# Altium PCB phone.PcbDoc
Units mm, origin at the board's own origin, x right, y up, seen from the top; angles counter-clockwise.
Board outline 35 x 16 mm, 2 copper layers (Top Layer, Bottom Layer); 17 components, 12 nets, 37 pads, 3 vias.
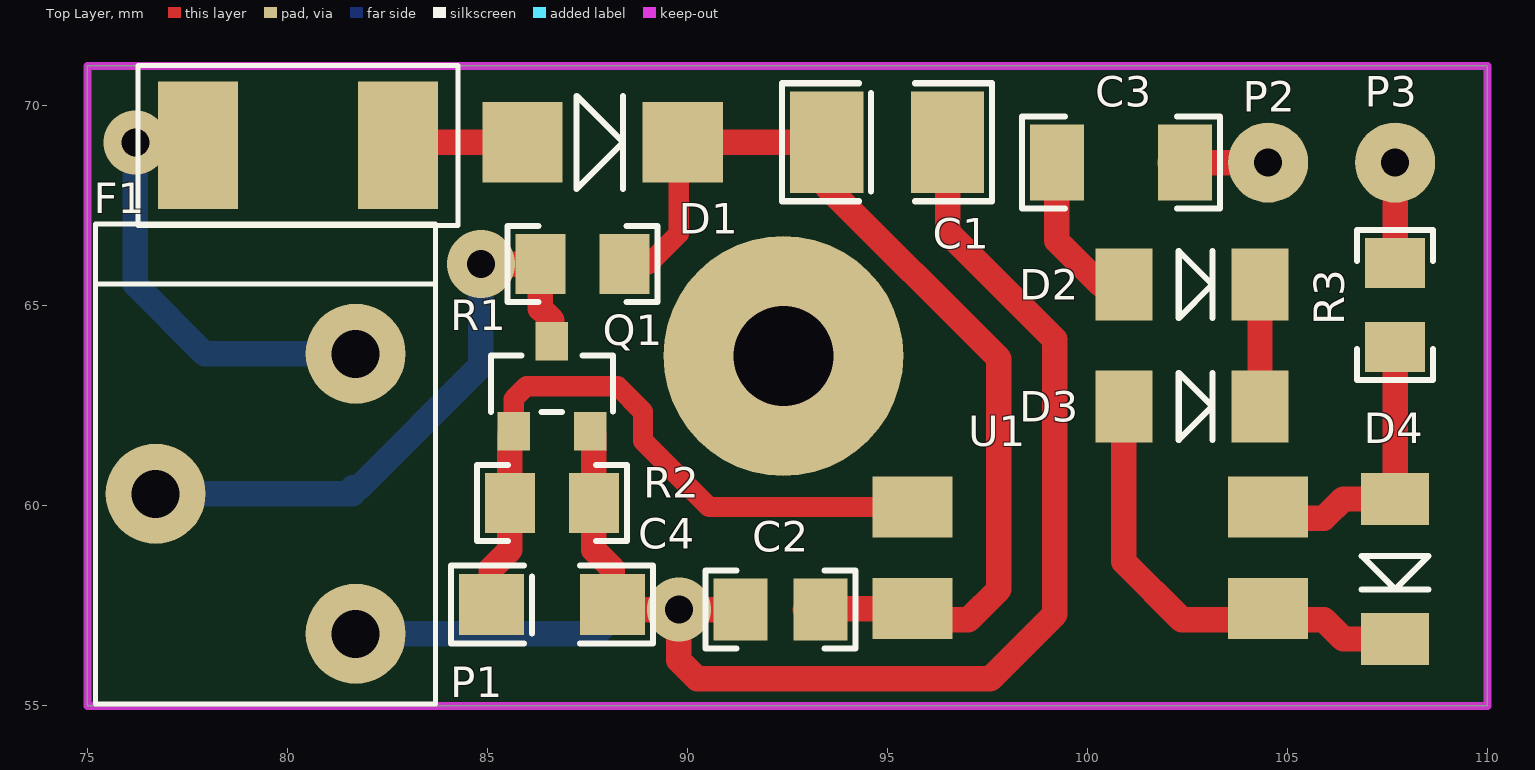
[diagram p0: Top Layer view]
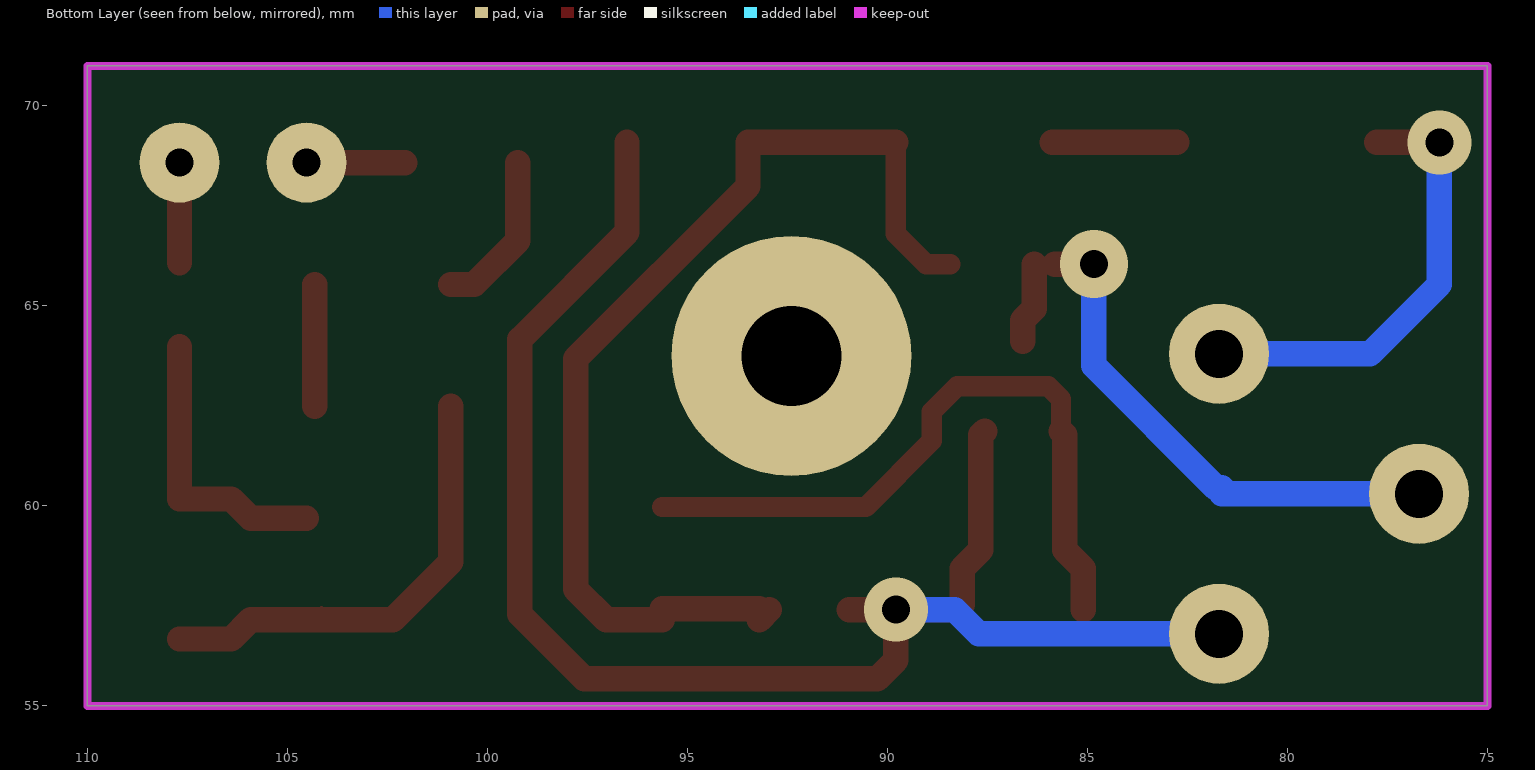
[diagram p1: Bottom Layer view, seen from below]

## Layer stack, top to bottom
Top Layer: signal copper 0.0356
Dielectric: dielectric 0.32, FR-4, Dk 4.8
Bottom Layer: signal copper 0.0356

## Board outline
75,55 110,55 110,71 75,71

## Design rules (kind name [scope] priority, off if disabled: settings)
Clearance [All] p1: gap=0.254
PolygonConnect [All] p1: connectstyle=Relief reliefconductorwidth=0.254 reliefentries=4 polygonreliefangle="90 Angle" airgapwidth=0.254
RoutingVias [All] p1: holewidth=0.7 width=1.6 viastyle="Through Hole" minholewidth=0.7 minwidth=1.6 maxholewidth=0.7 maxwidth=1.6
SolderMaskExpansion [All] p1: expansion=0.102
Width [All] p1: maxlimit=0.889 minlimit=0.508 preferedwidth=0.762 minimp=50.000000 maximp=50.000000 favimp=50.000000
28 further rules are at their usual default settings.

## Components (designator, comment, footprint, x,y, rotation, side; value= is the part's Value field where it differs from the comment)
C1 "10uF" TANC_B 94.996,69.088 r0 top
C2 "100nF" C0805 92.329,57.404 r180 top
C3 "470nF/100V" C1206 100.838,68.58 r180 top
C4 "1uF" TANC_A 86.614,57.531 r0 top
D1 "M4" SMA 87.884,69.088 r180 top
D2 "20V" SOD80C 102.616,65.532 r180 top
D3 "20V" SOD80C 102.616,62.484 r180 top
D4 "1N4148" DO-213A 107.696,58.42 r90 top
F1 "0679-0500-01" 0679-0500-01 80.264,69.012 r0 top
P1 "DG250-3.5-03P-11-00A(H)" DG250-3.5-03P-11-00A(H) 76.708,60.3 r270 top
P2 "PAD" PAD 104.521,68.58 r0 top
P3 "PAD" PAD 107.696,68.58 r0 top
Q1 "2N7002" SOT23 86.614,62.992 r0 top
R1 "10K" R0805 87.376,66.04 r0 top
R2 "100K" R0805 86.614,60.071 r180 top
R3 "10K" R0805 107.696,65.024 r90 top
U1 "LTV-817S-C" LTV-817 100.076,58.699 r90 top

## Footprints (in the part's own frame and the unit in brackets; to place one, negate y for a bottom-side part, rotate by r counter-clockwise, add the part's x,y. Pads: shape width x height; smd on the part's side, far side on the other; paste and mask are expansions set on the pad)
0679-0500-01 [mm]
  rect 2x3.18 smd: 1(-2.5,0) 2(2.5,0)
  silkscreen extent -4,-2 4,2, body extent -3.05,-1.3 3.05,1.39, height 2.69
C0805 [mm] "Chip Capacitor, Body 2.0x1.2mm, Height 1.3mm, IPC Low Density"
  rect 1.35x1.55 smd: 1(-1,0) 2(1,0)
  silkscreen extent -1.88,-0.97 1.88,0.97, body extent -1.1,-0.72 1.1,0.72, height 1.3
C1206 [mm] "Chip Capacitor, Body 3.2x1.6mm, Height 1.5mm, IPC Low Density"
  rect 1.35x1.9 smd: 1(-1.6,0) 2(1.6,0)
  silkscreen extent -2.47,-1.15 2.47,1.15, body extent -1.7,-0.9 1.7,0.9, height 1.5
DG250-3.5-03P-11-00A(H) [mm]
  round 2.5 hole 1.2: 1(-3.5,5) 2(0,0) 3(3.5,5)
  silkscreen extent -6.75,-1.5 5.25,7, body extent -6.75,-1.5 5.25,7, height 12
DO-213A [mm]
  rect 1.3x1.7 smd: 1(-1.75,0) 2(1.75,0)
  silkscreen extent -0.51,-0.84 0.33,0.84, body extent -1.75,-0.7 1.75,0.7, height 1.39
LTV-817 [mm]
  rect 1.524x2 smd: 1(-1.27,-4.445) 2(1.27,-4.445) 3(1.27,4.445) 4(-1.27,4.445)
  Top Layer lines w0.125: -1.524,-4.064 -1.27,-4.064
  body extent -2.29,-5.08 2.31,5.08, height 3.51
PAD [mm]
  round 2 hole 0.7: 1(0,0)
R0805 [mm] "Chip Resistor, Body 2.0x1.3mm, IPC Low Density"
  rect 1.25x1.5 smd: 1(-1.05,0) 2(1.05,0)
  silkscreen extent -1.88,-0.95 1.88,0.95, body extent -1.1,-0.67 1.1,0.67, height 0.7
SMA [mil]
  rect 79x79 smd: 1(-78.87,0) 2(78.87,0)
  silkscreen extent -20,-46 26,46, body extent -98,-53 98,53, height 87
SOD80C [mil]
  rect 56x71 smd: 1(-66.96,0) 2(66.96,0)
  silkscreen extent -20,-33 13,33, body extent -69,-30 69,30, height 59
SOT23 [mil]
  rect 32x38 smd: 1(-37.6,-44.33) 2(37.6,-44.33) 3(0,44.33)
  silkscreen extent -60,-26 60,30, body extent -57,-49 57,48, height 40
TANC_A [mil]
  rect 64x60 smd: 1(-59.53,0) 2(59.53,0)
  silkscreen extent -99,-38 99,38, body extent -64,-31 64,31, height 63
TANC_B [mil]
  rect 72x100 smd: 1(-59.53,0) 2(59.53,0)
  silkscreen extent -103,-58 103,58, body extent -69,-55 70,55, height 75

## Part data
C1 C4: library part Cap_Pol, "Capacitor Polarized"
C2 C3: library part Cap, "Capacitor"
D1 D4: library part Diode
D2 D3: library part "Diode Zener"
F1: "Bezpiecznik: topikowy; szybki; ceramiczny; 500mA; 125VAC; 125VDC"
Q1: library part 2N7002(GSD), "N-MOSFET"
R1 R2 R3: library part Res, "Resistor"
U1: "Transoptor; SMD; Kana³y:1; Wyj: tranzystorowe; Uizol:5kV; Uce:35"

## Free pads (board coordinates)
  round 6 hole 2.5: M(92.4,63.748)

## Via types
v1: diameter 1.6, hole 0.7, Top Layer to Bottom Layer, 2 vias
v2: diameter 1.7, hole 0.7, Top Layer to Bottom Layer, 1 vias

## Nets (pads, with @x,y where several pads share a name; then routed paths per layer and width w, separated by ;. In a path a pad name is that pad's centre, name@x,y a point inside that pad or via, vN(x,y) a via of type N, cw(c..) or ccw(c..) an arc to the next point about the centre after c; other vN are vias at no path point)
12V: C1.1 C2.1 D1.1 R1.2 U1.4 | length 25.9
  Top Layer w0.508: R1.2 89.027,66.04 89.789,66.802 D1.1@89.789,69.088
  Top Layer w0.635: D1.1@89.789,69.088 D1.1 C1.1 93.484,67.984 97.79,63.678 97.79,57.912 97.028,57.15 U1.4@95.631,57.15 ; C2.1@92.948,57.404 C2.1@93.202,57.15 ; C2.1@93.202,57.429 U1.4
GND: C1.2 C2.2 C4.2 P1.3 Q1.2 R2.1 | length 40.2
  Top Layer w0.635: Q1.2 87.664,61.771 87.664,58.894 88.126,58.432 C4.2 88.253,57.404 v1(89.789,57.404) ; C2.2@90.948,57.404 v1(89.789,57.404) ; C1.2 96.508,66.839 99.187,64.16 99.187,57.285 97.574,55.671 90.252,55.671 89.789,56.134 v1(89.789,57.404)
  Bottom Layer w0.635: P1.3 87.711,56.8 88.316,57.404 v1(89.789,57.404)
NetC3_1: C3.1 P2.1 | length 2.5
  Top Layer w0.635: C3.1@102.057,68.58 P2.1
NetC3_2: C3.2 D2.2 | length 4.1
  Top Layer w0.635: C3.2 99.238,66.624 100.33,65.532 D2.2
NetC4_1: C4.1 Q1.1 R2.2 U1.3 | length 17.3
  Top Layer w0.508: Q1.1 85.659,62.672 85.979,62.992 88.257,62.992 88.892,62.357 88.892,61.62 90.543,59.969 U1.3
  Top Layer w0.635: C4.1@85.102,57.404 85.102,58.432 85.564,58.894 85.564,61.771 Q1.1
NetD1_2: D1.2 F1.2 | length 3.1
  Top Layer w0.635: F1.2@82.764,69.088 D1.2
NetD2_1: D2.1 D3.1 | length 3
  Top Layer w0.635: D3.1 D2.1
NetD3_2: D3.2 D4.1 U1.1 | length 11.5
  Top Layer w0.635: D3.2 100.915,58.597 102.362,57.15 104.14,57.15 104.521,57.15 105.918,57.15 106.398,56.67 D4.1
NetD4_2: D4.2 R3.1 U1.2 | length 7.2
  Top Layer w0.635: U1.2@104.521,59.69 105.918,59.69 106.398,60.17 D4.2 R3.1
NetF1_1: F1.1 P1.1 | length 11.3
  Top Layer w0.635: v1(76.2,69.088) F1.1@77.764,69.088
  Bottom Layer w0.635: v1(76.2,69.088) 76.2,65.532 77.932,63.8 P1.1
NetP3_1: P3.1 R3.2 | length 2.5
  Top Layer w0.635: R3.2 P3.1
OUT: P1.2 Q1.3 R1.1 | length 15.5
  Top Layer w0.635: v2@84.328,66.04 v2(84.836,66.04) R1.1@85.818,66.04 ; R1.1 86.326,64.931 86.614,64.643 Q1.3
  Bottom Layer w0.635: P1.2 81.636,60.3 ; 81.636,60.452 81.788,60.452 84.836,63.5 v2(84.836,66.04)

## Keep-outs
Keep-Out Layer:
  the board outline again, w0.2